# Altium PCB PowerBoard.PcbDoc
Units mm, origin at the board's own origin, x right, y up, seen from the top; angles counter-clockwise.
Board outline 112.88 x 192.86 mm, 2 copper layers (Top Layer, Bottom Layer); 16 components, 8 nets, 53 pads, 0 vias.
Unrouted connection lines stored in the file: 36.
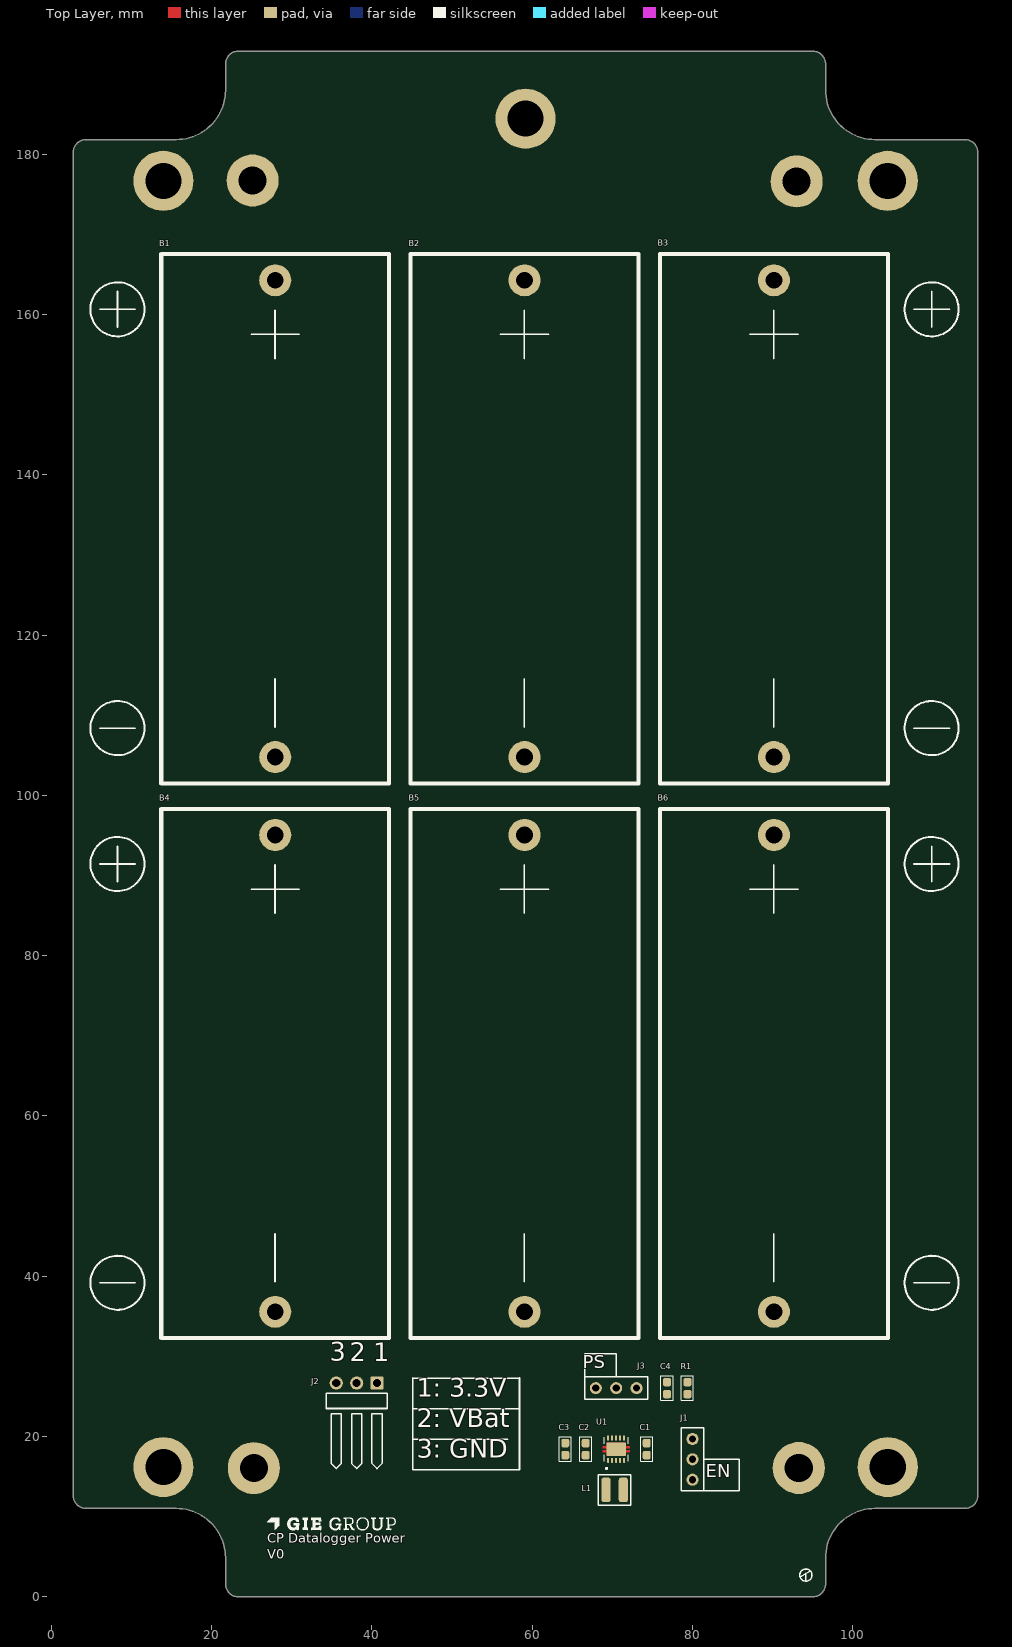
[diagram p0: Top Layer view]
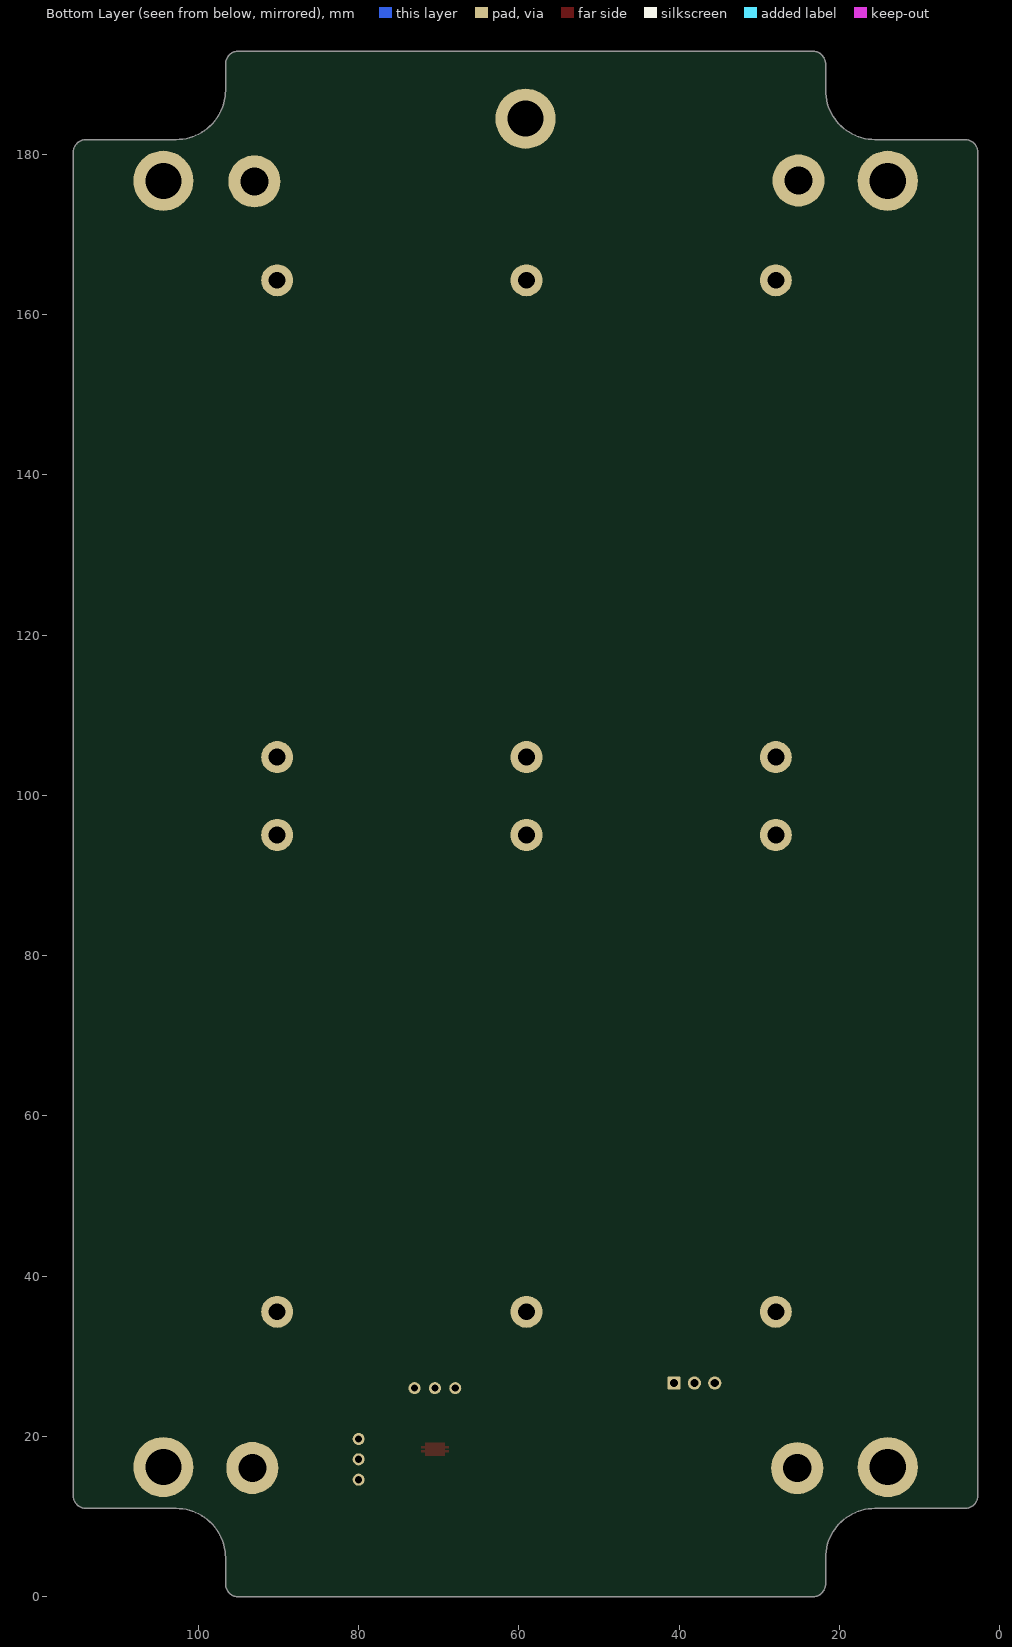
[diagram p1: Bottom Layer view, seen from below]

## Layer stack, top to bottom
Top Solder: solder mask 0.0102, Solder Resist, Dk 3.5
Top Layer: signal copper 0.0356
Dielectric 1: dielectric 0.32, FR-4, Dk 4.8
Bottom Layer: signal copper 0.0356
Bottom Solder: solder mask 0.0102, Solder Resist, Dk 3.5

## Board outline
96.616,1.6 96.615,4.854 cw(c102.785,4.854) 102.785,11.024 114.015,11.025 ccw(c114.015,12.625) 115.615,12.625 115.615,180.235 ccw(c114.015,180.235) 114.015,181.835 102.785,181.836 cw(c102.785,188.006) 96.615,188.006 96.615,191.26 96.616,191.26 ccw(c95.016,191.26) 95.016,192.86 23.335,192.86 ccw(c23.335,191.26) 21.735,191.26 21.735,188.006 cw(c15.565,188.006) 15.565,181.836 4.335,181.835 ccw(c4.335,180.235) 2.735,180.235 2.735,12.625 ccw(c4.335,12.625) 4.335,11.025 15.565,11.024 cw(c15.565,4.854) 21.735,4.854 21.735,1.6 ccw(c23.335,1.6) 23.335,0 95.016,0 ccw(c95.016,1.6)

## Design rules (kind name [scope] priority, off if disabled: settings)
Clearance [All] p1: gap=0.254 ignorepadtopadclearanceinfootprint=FALSE except(0: Arc-Hole Track-Hole SMDPad-Hole THPad-Hole Via-Hole Fill-Hole Poly-Hole Region-Hole Text-Hole)
PolygonConnect [All] p1: connectstyle=Relief reliefconductorwidth=0.254 reliefentries=4 polygonreliefangle="90 Angle" airgapwidth=0.254
RoomDefinition POWER [InComponentClass('POWER')] p1: confinementstyle=ConfineOut formatcopy=TRUE lockcomponents=FALSE outline 249.555,94.45 392.555,94.45 392.555,171.45 249.555,171.45
RoutingVias [All] p1: holewidth=0.711 width=1.27 viastyle="Through Hole" minholewidth=0.711 minwidth=1.27 maxholewidth=0.711 maxwidth=1.27
SolderMaskExpansion [All] p1: expansion=0.102 istentingtop=FALSE
Width [All] p1: maxlimit=0.254 minlimit=0.254 preferedwidth=0.254
30 further rules are at their usual default settings.

## Components (designator, comment, footprint, x,y, rotation, side; value= is the part's Value field where it differs from the comment)
B1 "2230" KEYSTONE-2230 27.94,134.525 r270 top value="C Size Holder"
B2 "2230" KEYSTONE-2230 59.055,134.525 r270 top value="C Size Holder"
B3 "2230" KEYSTONE-2230 90.17,134.525 r270 top value="C Size Holder"
B4 "2230" KEYSTONE-2230 27.94,65.31 r270 top value="C Size Holder"
B5 "2230" KEYSTONE-2230 59.055,65.31 r270 top value="C Size Holder"
B6 "2230" KEYSTONE-2230 90.17,65.31 r270 top value="C Size Holder"
C1 "C0603C106M9PAC7867" CAP-0603 74.295,18.415 r270 top value=10.0uF
C2 "C0603C106M9PAC7867" CAP-0603 66.675,18.415 r270 top value=10.0uF
C3 "C0603C106M9PAC7867" CAP-0603 64.135,18.415 r270 top value=10.0uF
C4 "C0603C104K5RACAUTO" CAP-0603 76.835,26.035 r270 top value=0.1uF
J1 "PRPC003SAAN-RC" PIN3 80.01,14.605 r90 top
J2 "640455-3" TE-640455-3 35.56,26.67 r180 top
J3 "PRPC003SAAN-RC" PIN3 73.025,26.035 r180 top
L1 "LPS3015-222MRC" COILCRAFT-LPS3015 70.295,13.335 r180 top value=2.2uH
R1 "RC0805FR-07100KL" RES-0603 79.375,26.035 r270 top value=105
U1 "TPS63001DRCT" VSON10 70.485,18.415 r90 top

## Footprints (in the part's own frame and the unit in brackets; to place one, negate y for a bottom-side part, rotate by r counter-clockwise, add the part's x,y. Pads: shape width x height; smd on the part's side, far side on the other; paste and mask are expansions set on the pad)
CAP-0603 [mm] "Chip Capacitor 0603"
  rrect50% 1.05x1 smd: 1(-0.75,0) 2(0.75,0)
  silkscreen extent -1.52,-0.76 1.52,0.75, body extent -0.88,-0.48 0.87,0.47, height 0.6
COILCRAFT-LPS3015 [mm]
  rrect50% 1.14x3.05 smd: 1(-1.08,0) 2(1.08,0)
  silkscreen extent -2.03,-1.91 2.03,1.91, body extent -1.48,-1.48 1.48,1.48, height 1.4
KEYSTONE-2230 [mm] "BATTERY HOLDER C 1 CELL"
  round 4 hole 2.1: 1(-29.75,0) 2(29.75,0)
  silkscreen extent -33.02,-14.22 33.02,14.22, body extent -29.59,-12.7 29.22,12.7, height 28.75
PIN3 [mm]
  round 1.5 hole 0.9: 1(0,0) 3(5.08,0)
  oval 1.51x1.5 hole 0.9: 2(2.54,0)
  silkscreen extent -1.4,-1.4 6.48,1.4, body extent -1.21,-1.46 6.41,1.46, height 8.51
RES-0603 [mm] "Chip Resistor 0603"
  rrect50% 1.05x1 smd: 1(-0.75,0) 2(0.75,0)
  silkscreen extent -1.52,-0.76 1.52,0.75, body extent -0.88,-0.48 0.87,0.47, height 0.6
TE-640455-3 [mm] "CONN HEADER RTANG 3POS .100 TIN"
  rrect25% 1.65x1.65 hole 1.02: 1(-5.08,0)
  round 1.65 hole 1.02: 2(-2.54,0) 3(0,0)
  silkscreen extent -6.35,1.27 1.27,10.67, body extent -6.35,-0.25 1.27,10.79, height 6.49
VSON10 [mm]
  rrect25% 0.6x0.24 smd mask+0: 1(-1.4,1) 2(-1.4,0.5) 3(-1.4,0) 4(-1.4,-0.5) 5(-1.4,-1) 6(1.4,-1) 7(1.4,-0.5) 8(1.4,0) 9(1.4,0.5) 10(1.4,1)
  rrect5% 1.65x2.4 smd paste-2 mask+0: 11(0,0)
  Top Layer region: 0.375,1.2 0.825,1.2 0.825,-1.2 0.375,-1.2 0.375,-1.7 0.125,-1.7 0.125,-1.2 -0.125,-1.2 -0.125,-1.7 -0.375,-1.7 -0.375,-1.2 -0.825,-1.2 -0.825,1.2 -0.375,1.2 -0.375,1.7 -0.125,1.7 -0.125,1.2 0.125,1.2 0.125,1.7 0.375,1.7
  silkscreen extent -2.49,-1.5 1.5,1.5, body extent -1.5,-1.5 1.5,1.5, height 1

## Part data
B1 B2 B3 B4 B5 B6: Manufacturer=Keystone, PartNumber=2230
C1 C2 C3: "CAP CER 10uF 10V X5R 0603", Manufacturer=Kemet, Supplier Part Number 1=399-C0603C105M3RAC7867CT-ND, Tolerance=20%, Voltage=10, PartNumber=C0603C106M9PAC7867, Supplier 1=Digi-Key, Supplier 2=Mouser, Supplier Part Number 2=80-C0603C105M3R
C4: "CAP CER 0.1uF 50V X7R 0603", Manufacturer=Kemet, Supplier Part Number 1=399-6856-1-ND, Tolerance=10%, Voltage=50, PartNumber=C0603C104K5RACAUTO, Supplier 1=Digi-Key, Supplier 2=Mouser, Supplier Part Number 2=80-C0603C104K5RAUTO
J1 J3: "CONN HEADER .100\" SNGL STR 3POS", Manufacturer="Sullins Connector Solutions", Supplier Part Number 1=S1011EC-03-ND, PartNumber=PRPC003SAAN-RC, Supplier 1=Digi-Key
J2: "CONN HEADER RTANG 3POS .100 TIN", Manufacturer="TE Connectivity", Supplier Part Number 1=A19451-ND, Mating Conn=1375820-3, PartNumber=640455-3, Supplier 1=Digi-Key, Supplier 2=Mouser, Supplier Part Number 2=571-6404553
L1: "2.2 µH Shielded Inductor 1.4 A 110 mOhm", Current=1.4A, Manufacturer=Coilcraft, PartNumber=LPS3015-222MRC
R1: library part RC0805FR-07105RL, "RES SMD 105 OHM 1% 1/8W 0805", Manufacturer=Yageo, Power=0.125W, Supplier Part Number 1=311-100KCRCT-ND, Tolerance=1%, PartNumber=RC0805FR-07100KL, Supplier 1=Digi-Key, Supplier 2=Mouser, Supplier Part Number 2=603-RC0805FR-07100KL
U1: "Buck Boost Regulator 3.3V 1.6A 10VSON", Manufacturer="Texas Instruments", PartNumber=TPS63001DRCT

## Free pads (board coordinates)
  round 7.5 hole 4.5: M1(13.975,16.18) M3(104.375,16.18) M4(104.375,176.695) M5(59.175,184.443) M6(13.975,176.695)
  round 6.5 hole 3.5: S1(25.267,16.051) S2(93.27,16.074) S3(93.012,176.623) S4(25.117,176.728)

## Nets (pads, with @x,y where several pads share a name; then routed paths per layer and width w, separated by ;. In a path a pad name is that pad's centre, name@x,y a point inside that pad or via, vN(x,y) a via of type N, cw(c..) or ccw(c..) an arc to the next point about the centre after c; other vN are vias at no path point)
3.3V: C2.2 C3.2 J2.1 U1.1 U1.10
GND: B1.2 B2.2 B3.2 B4.2 B5.2 B6.2 C1.1 C2.1 C3.1 C4.1 J1.3 J2.3 J3.3 U1.3 U1.9 U1.11
NetB1_1: B1.1 B2.1 B3.1 B4.1 B5.1 B6.1 J1.1
NetC4_2: C4.2 J3.1 R1.2 U1.6 U1.8
NetJ3_2: J3.2 U1.7
NetL1_1: L1.1 U1.4
NetL1_2: L1.2 U1.2
VBat: C1.2 J1.2 J2.2 R1.1 U1.5

## Silkscreen, mask and mechanical layers (free items; w line width, h text height)
Top Overlay:
  drawing of 45 lines, arcs and shapes, not listed
  text "3" at 34.723,28.618 h4
  text "2" at 37.247,28.575 h4
  text "1" at 40.168,28.575 h4
  text "PS" at 66.334,27.94 h2.8
  text "1: 3.3V" at 45.628,24.13 h4
  text "2: VBat" at 45.628,20.32 h4
  text "3: GND" at 45.628,16.51 h4
  text "EN" at 81.638,14.351 h2.8
  text "CP Datalogger Power / V0" at 26.924,4.318 h2
Mechanical 1:
  lines w0.2: 15.384,181.77 ccw(c15.384,188.12) 21.734,188.12 ; 15.446,181.775 4.335,181.835 ccw(c4.335,180.235) 2.735,180.235 2.735,12.625 ccw(c4.335,12.625) 4.335,11.025 15.565,11.024 cw(c15.565,4.854) 21.735,4.854 21.735,1.6 ccw(c23.335,1.6) 23.335,0 95.016,0 ccw(c95.016,1.6) 96.616,1.6 96.615,4.854 cw(c102.785,4.854) 102.785,11.024 114.015,11.025 ccw(c114.015,12.625) 115.615,12.625 ; 21.735,188.138 21.735,191.26 cw(c23.335,191.26) 23.335,192.86 95.016,192.86 cw(c95.016,191.26) 96.616,191.26 96.615,188.006 ccw(c102.785,188.006) 102.785,181.836 114.015,181.835 cw(c114.015,180.235) 115.615,180.235 115.615,12.65

## Dimensions
23.335,192.86 to 95.016,0 on Mechanical 16
102.785,11.024 to 95.016,0 on Mechanical 16
15.384,188.12 to 15.115,188 on Mechanical 16
4.335,12.625 to -4.55,3.74 on Mechanical 16
21.735,1.6 to 2.735,12.625 on Mechanical 16
115.615,12.65 to 2.735,12.625 on Mechanical 16